# Altium PCB MAIN.PcbDoc
Units mil, origin at the board's own origin, x right, y up, seen from the top; angles counter-clockwise.
Board outline 1100 x 700 mil, 2 copper layers (SIG, GND), stack 36.8 mil thick; 16 components, 9 nets, 34 pads, 3 vias.
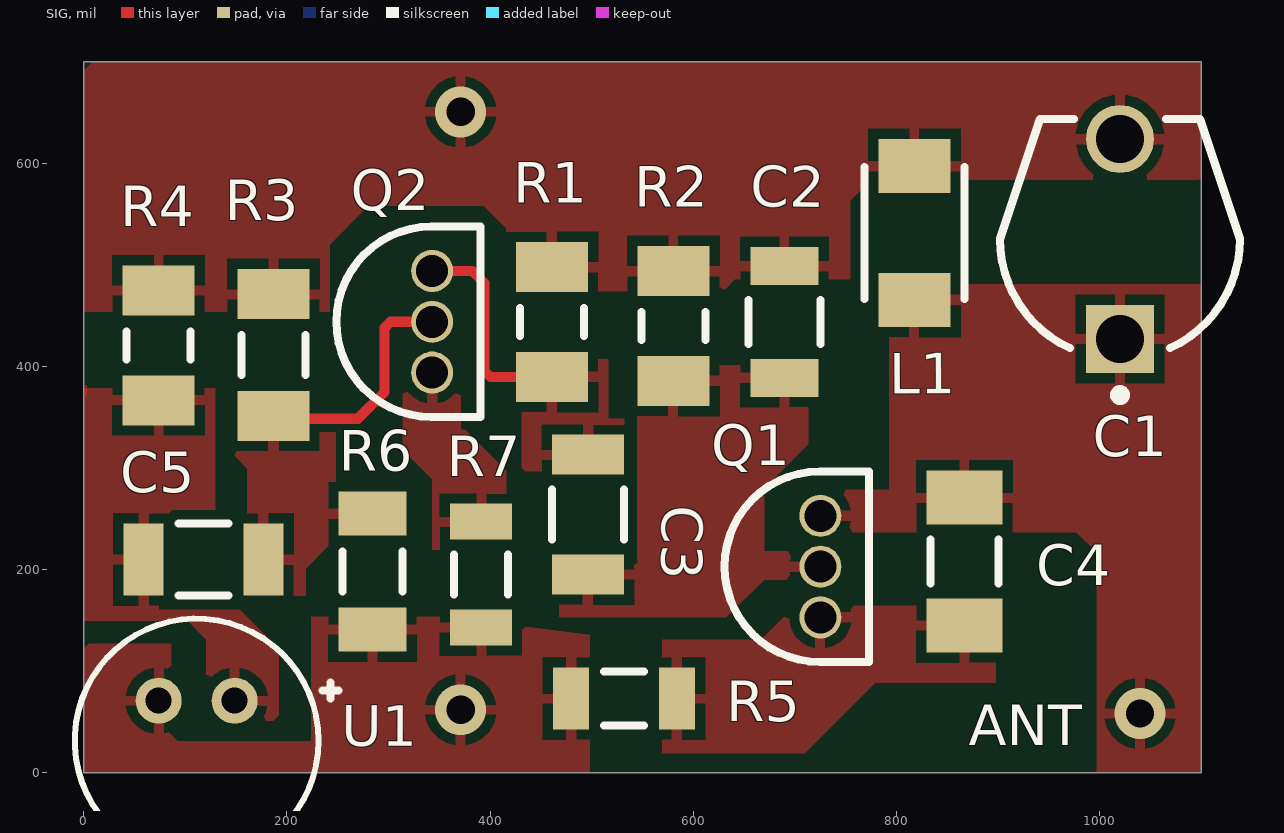
[diagram p0: SIG view]
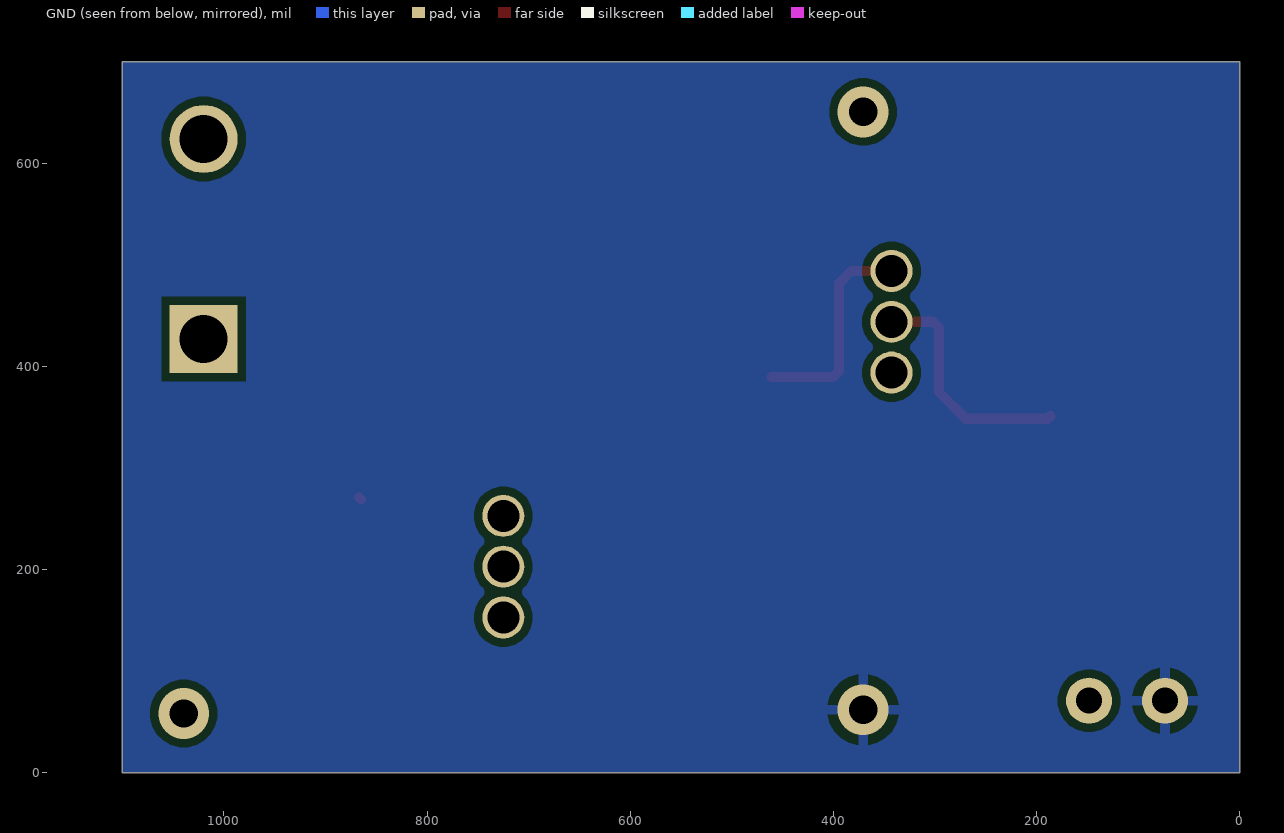
[diagram p1: GND view, seen from below]

## Layer stack, top to bottom
Top Solder: solder mask 0.4, Solder Resist, Dk 3.5
SIG: signal copper 1.4
Dielectric 3: core 34, FR-4, Dk 4.8
GND: signal copper 1.4
Bottom Solder: solder mask 0.4, Solder Resist, Dk 3.5

## Board outline
0,0 1100,0 1100,700 0,700

## Design rules (kind name [scope] priority, off if disabled: settings)
Clearance [All] p1: gap=8 ignorepadtopadclearanceinfootprint=TRUE
ComponentClearance [All] p1: gap=8 collisioncheckmode=3 verticalgap=8 showdistances=FALSE
DiffPairsRouting [All] p1: maxlimit=10 minlimit=10 mostfreqgap=10 toplayer_minwidth=10 toplayer_maxwidth=10 toplayer_prefwidth=10 bottomlayer_minwidth=10 bottomlayer_maxwidth=10 bottomlayer_prefwidth=10 maxuncoupledlength=500
HoleSize [All] p1: absolutevalues=TRUE maxlimit=300 minlimit=10 maxpercent=80.000 minpercent=20.000
MinimumAnnularRing [All] p1: minimumring=10
PasteMaskExpansion [All] p1: expansion=10
PlaneClearance [All] p1: clearance=15
PlaneConnect [All] p1: pad.planeconnectstyle=Relief pad.reliefexpansion=20 pad.reliefentries=4 pad.reliefconductorwidth=10 pad.reliefairgap=10 via.planeconnectstyle=Direct via.reliefexpansion=20 via.reliefentries=4 via.reliefconductorwidth=10 via.reliefairgap=10
PolygonConnect [All] p1: thpad.connectstyle=Relief thpad.reliefconductorwidth=10 thpad.reliefentries=4 thpad.polygonreliefangle="90 Angle" thpad.airgapwidth=10 smdpad.connectstyle=Relief smdpad.reliefconductorwidth=10 smdpad.reliefentries=4 smdpad.polygonreliefangle="90 Angle" smdpad.airgapwidth=10 via.connectstyle=Direct via.reliefconductorwidth=10 via.reliefentries=4 via.polygonreliefangle="90 Angle" via.airgapwidth=10
RoutingVias [All] p1: holewidth=10 width=20 viastyle="Through Hole" minholewidth=10 minwidth=20 maxholewidth=10 maxwidth=20
SMDNeckDown [All] p1: percent=100.000
SilkToSolderMaskClearance SilkscreenOverComponentPads [IsPad] p1: minsilkscreentomaskgap=10 clearancetoexposedcopper=TRUE
SolderMaskExpansion [All] p1: expansion=10 istentingtop=FALSE
Width [All] p1: maxlimit=10 minlimit=10 preferedwidth=10
23 further rules are at their usual default settings.

## Components (designator, comment, footprint, x,y, rotation, side; value= is the part's Value field where it differs from the comment)
C1 "TZ03R300F169B00" MURA-TZ03-2_V 1020,525.42 r90 top
C2 "C1206C103K2RACTU" FP-C1206C-EB-MFG 689.68,443.73 r270 top value="10 nF"
C3 "CC1206KRX7R9BB104" FP-CC1206-1_25-MFG 496.42,254.11 r270 top value="100 nF"
C4 "CAP 4.7pF 50V 1206(3216)" CAPC1206(3216)170_M 866.88,207.89 r90 top value=4.7pF
C5 "CC1206KRX7R9BB104" FP-CC1206-1_25-MFG 118,210 r0 top value="100 nF"
L1 "7447912" SMD-1210 817.67,531.33 r270 top
Q1 "2N3904BU" FAIR-TO-92 725.12,152.96 r90 top
Q2 "2N3904BU" FAIR-TO-92 343,394 r90 top
R1 "CRCW120610K0FKEAHP" RESC3116X65X50NL20T20 460.99,443.73 r90 top
R2 "CRCW120610K0FKEAHP" RESC3116X65X50NL20T20 580.41,439.79 r90 top
R3 "RT1206BRD071ML" RESC3116X65X40ML10T20 186.9,411.17 r90 top
R4 "CRCW120610K0FKEAHP" RESC3116X65X50NL20T20 73.78,420.87 r90 top
R5 "ERJ-8ENF1001V" RESC3216X70X50LL05T20 531.85,73.04 r0 top
R6 "CRCW1206100KFKEA" RESC3216X60X45NL10T20 284.32,197.96 r90 top
R7 "ERJ-P08J101V" RESC3216X70X50LL05T20 391.22,195.06 r90 top
U1 "POM-3535P-3-R" FP-POM-3535P-3-R-MFG 111.18,31.67 r180 top

## Footprints (in the part's own frame and the unit in brackets; to place one, negate y for a bottom-side part, rotate by r counter-clockwise, add the part's x,y. Pads: shape width x height; smd on the part's side, far side on the other; paste and mask are expansions set on the pad)
CAPC1206(3216)170_M [mm] "Chip Capacitor, Body 3.2x1.6mm, Height 1.7mm, IPC Low Density"
  rect 1.35x1.9 smd: 1(-1.6,0) 2(1.6,0)
  silkscreen extent -0.55,-0.85 0.55,0.85, body extent -1.7,-0.9 1.7,0.9, height 1.7
FAIR-TO-92 [mm] "TO, 3-Leads, Body Dia 4.79mm, Pitch 1.27mm"
  round 1.05 hole 0.8 mask+0.05: 1(0,0) 2(1.27,0) 3(2.54,0)
  silkscreen extent -1.11,-1.21 3.65,2.4, body extent -1.11,-1.21 3.65,2.4, height 5.33
FP-C1206C-EB-MFG [mm]
  rect 0.95x1.7 smd paste+0 mask+0: 1(-1.4,0) 2(1.4,0)
  silkscreen extent -0.55,-0.9 0.55,0.9, body extent -2,-1 2,1, height 0.25
FP-CC1206-1_25-MFG [mm]
  rect 1x1.8 smd paste+0 mask+0: 1(-1.5,0) 2(1.5,0)
  silkscreen extent -0.63,-0.9 0.63,0.9, body extent -2.2,-1.25 2.2,1.25, height 0.25
FP-POM-3535P-3-R-MFG [mm]
  round 1.15 hole 0.65 paste-1000 mask+0: 1(-0.95,-1) 2(0.95,-1)
  silkscreen extent -3.55,-3.05 3.05,3.05, body extent -3.15,-3.15 3.15,3.15, height 0.25
MURA-TZ03-2_V [mm] "THD, 2-Leads, Dia 6mm, Height 4.8mm"
  rect 1.7x1.7 hole 1.2: 1(-2.5,0)
  round 1.7 hole 1.2: 2(2.5,0)
  silkscreen extent -4.02,-3 3,3, body extent -3,-3 3,3, height 4.8
RESC3116X65X40ML10T20 [mm] "Chip Resistor, 2-Leads, Body 3.10x1.60mm, IPC Low Density"
  rect 1.25x1.8 smd: 1(-1.525,0) 2(1.525,0)
  silkscreen extent -0.5,-0.8 0.5,0.8, body extent -1.6,-0.85 1.6,0.85, height 0.65
RESC3116X65X50NL20T20 [mm] "Chip Resistor, 2-Leads, Body 3.10x1.60mm, IPC Medium Density"
  rect 1.25x1.8 smd: 1(-1.375,0) 2(1.375,0)
  silkscreen extent -0.35,-0.8 0.35,0.8, body extent -1.65,-0.9 1.65,0.9, height 0.65
RESC3216X60X45NL10T20 [mm] "Chip Resistor, 2-Leads, Body 3.20x1.60mm, IPC Medium Density"
  rect 1.1x1.7 smd: 1(-1.45,0) 2(1.45,0)
  silkscreen extent -0.5,-0.75 0.5,0.75, body extent -1.65,-0.85 1.65,0.85, height 0.6
RESC3216X70X50LL05T20 [mm] "Chip Resistor, 2-Leads, Body 3.20x1.60mm, IPC High Density"
  rect 0.9x1.55 smd: 1(-1.325,0) 2(1.325,0)
  silkscreen extent -0.5,-0.67 0.5,0.67, body extent -1.63,-0.82 1.62,0.82, height 0.7
SMD-1210 [mm] "Chip Inductor, 2-Leads, Body 3.2x2.5mm"
  rect 1.35x1.8 smd: 1(-1.675,0) 2(1.675,0)
  silkscreen extent -1.65,-1.25 1.65,1.25, body extent -1.6,-1.25 1.6,1.25, height 1.29

## Part data
C1: library part CMP-2000-07339-1, "Variable Capacitor, Miniature Ceramic Trimmer, Green, 30 pF, -25 to 85 degC, 2-Pin THD, Bulk", Capacitance=5.2to30pF, Case Size/Dimension=6x6x4.8mm, Dielectric=N750, Manufacturer=Murata, Package Description="2-Pin Through Hole Device, Dia 6 mm, Body Length 4.8 mm", Package Reference=TZ03, Rated Voltage=100V, Tolerance (%)=0to50%, Datasheet URL=https://datasheet.ciiva.com/29339/12-0130e-29339940.pdf, Datasheet Version="Rev. A, 04/2003", Manufacturer URL=http://www.murata.com/, Mounting Technology=ThroughHole
C2: library part CMP-1037-03529-2, "CAP CER 10000PF 200V X7R 1206", Capacitance="10,000 pF", Manufacturer=KEMET, Package=1206, Temperature="-55°C to +150°C", Temperature Characteristic=X7R, Temperature Coefficient=15%, Temperature Range High=+150°C, Temperature Range Low=-55°C, Tolerance=0.1, Voltage Rating="200 V", Automotive=Yes, Automotive Grade="Grade 0", Category=Cap, ComponentLink2Description=Datasheet, ComponentLink2URL=https://content.kemet.com/datasheets/KEM_C1007_X8R_ULTRA_150C_SMD.pdf, Device Class L1="Passive Components", Device Class L2=Capacitors, Device Class L3="Ceramic Capacitors", Digikey Description="CAP CER 10000PF 200V X7R 1206", Height=0.88mm, Ipc Land Pattern Name=CAPC320160X78, Lead Free=Yes, Manufacturer Part Number=C1206C103K2RACTU, Material=Ceramic, Mouser Description="Multilayer Ceramic Capacitors MLCC - SMD/SMT 200volts 10000pF X7R 10%", Octopart=https://octopart.com/c1206c103k2ractu-kemet-2299149, RoHS=TRUE
C3 C5: library part CMP-03422-000842-1, "CAP CER 0.1UF 50V X7R 1206", Capacitance="100 nF", Manufacturer=Yageo, Package=1206, Temperature="-55°C to +125°C", Temperature Characteristic=X7R, Temperature Coefficient=15%, Temperature Range High=+125°C, Temperature Range Low=-55°C, Tolerance=0.1, Voltage Rating="50 V", Automotive=No, Automotive Grade=NA, Category=Cap, ComponentLink2Description=Datasheet, ComponentLink2URL=http://www.yageo.com/documents/recent/UPY-NP0X7R_HV_1KV-to-3KV_11.pdf, Device Class L1="Passive Components", Device Class L2=Capacitors, Device Class L3="Ceramic Capacitors", Digikey Description="CAP CER 0.1UF 50V X7R 1206", Footprint Url=http://www.yageo.com/exep/pages/download/literatures/UPY-C_GEN_24.pdf, Height=1.45mm, Lead Free=Yes, Manufacturer Part Number=CC1206KRX7R9BB104, Material=Ceramic, Mouser Description="Multilayer Ceramic Capacitors MLCC - SMD/SMT 100nF 50V X7R 10%", Octopart=https://octopart.com/cc1206krx7r9bb104-yageo-39467816, RoHS=TRUE
C4: library part CMP-1037-00382-1, Case-EIA=1206, Case-Metric=3216, Rated Voltage="50 V", Tolerance=Â±0.25pF, Max Thickness="1.7 mm", Technology=SMT
L1: library part CMP-0221-00034-1, "SMD-Multilayer Inductor WE-MI, L = 0.10 µH", Inductance="0.10 µH", ComponentLink1Description="Manufacturer Link", ComponentLink1URL=http://www.we-online.com, ComponentLink2Description=Datasheet, ComponentLink2URL=http://www.we-online.de/katalog/media/pdf/7447912.pdf, DatasheetVersion="ver 5, Oct-2004", PackageDescription="Chip Inductor, 2-Leads, Body 3.2 x 2.5 mm", PackageReference=1206, PackageVersion=2007
Q1 Q2: library part CMP-2000-04944-1, "NPN General-Purpose Amplifier, 40 V VCEO, 0.2 A, -55 to 150 degC, 2-Pin TO-92, RoHS, Bulk", Manufacturer=FairchildSemiconductor, Maximum Collector Base Voltage=60V, Maximum Collector Emitter Saturation Voltage=0.2@1mA@10mA, Maximum Collector Emitter Voltage=40V, Maximum DC Collector Current=0.2A, Maximum Operating Frequency=300(Min)MHz, Maximum Power Dissipation=625mW, Minimum DC Current Gain=40@0.1mA@1V, Operating Temperature=-55to150degC, Package=3TO-92, Package Description="3-Pin Transistor Outline Package, Body Dia 4.79 mm, Pitch 1.27 mm", Package Reference=TO-92, Category=GPBJT, Datasheet URL=https://datasheet.ciiva.com/4722/2n3904-82270-4722369.pdf, Datasheet Version="Rev. 1.1.0, 10/2014", Manufacturer URL=https://www.fairchildsemi.com/, Mounting=ThroughHole, Packaging=Bulk, Pin Count=3, Rad Hard=No, Type=NPN
R1 R2 R4: library part CMP-2003-04883-1, Manufacturer="Vishay Dale", Part Number=CRCW120610K0FKEAHP
R3: library part CMP-2003-04285-1, Manufacturer=Yageo, Part Number=RT1206BRD071ML
R5: library part CMP-2003-00017-1, Manufacturer=Panasonic, Part Number=ERJ-8ENF1001V
R6: library part CMP-1014-00736-2, Manufacturer="Vishay Dale", Part Number=CRCW1206100KFKEA
R7: library part CMP-2003-00713-1, Manufacturer=Panasonic, Part Number=ERJ-P08J101V
U1: library part CMP-231723-000001-1, "MIC COND ANALOG OMNI -35DB 6MM D", Operating Supply Current=500uA, Package Quantity=100, Resistance=2200R, Voltage Rating=2V, Depth=3.7mm, Diameter=6mm, Direction=Omnidirectional, Height=3.7mm, Impedance=2.2kR, Mount="Through Hole", Output Type=Analog, Packaging=Bulk, Shape=Round, Termination="PC Pins"

## Via types
v1: diameter 50, hole 28, SIG to GND, 3 vias

## Nets (pads, with @x,y where several pads share a name; then routed paths per layer and width w, separated by ;. In a path a pad name is that pad's centre, name@x,y a point inside that pad or via, vN(x,y) a via of type N, cw(c..) or ccw(c..) an arc to the next point about the centre after c; other vN are vias at no path point)
9V: C1.2 C2.1 L1.1 R1.2 R2.2 R3.2 R4.2
  other v1: 370.95,650.54
GND: R5.1 R6.1 R7.1 U1.2
  other v1: 370.95,62.03
NetC1_1: C1.1 C4.2 L1.2 Q1.3 | length 2.7
  SIG w10: C4.2@865,269 C4.2
  other v1: 1039.68,58.44
NetC2_2: C2.2 C3.2 Q1.2 R2.1 | length 2.8
  SIG w10: Q1.2@723.15,200.99 Q1.2
NetC3_1: C3.1 Q2.3 R1.1 | length 211.9
  SIG w10: Q2.3 382.46,494 394.57,481.89 394.57,395.46 400.43,389.6 R1.1
NetC4_1: C4.1 Q1.1 R5.2
NetC5_1: C5.1 R4.1 U1.1
NetC5_2: C5.2 Q2.2 R3.1 R6.2 | length 234
  SIG w10: R3.1@186.79,351.02 R3.1 189.54,348.49 269.86,348.49 296.21,374.83 296.21,438.14 302.07,444 Q2.2
NetQ2_1: Q2.1 R7.2 | length 0.8
  SIG w10: Q2.1@342.41,393.41 Q2.1

## Polygon pours and split planes (outlines as drawn)
NetC3_1 on SIG "NETC3_1_L01_P007" (solid, pour order 7): 431.15,407.09 516.1,407.09 516.1,348.49 531.85,348.49 531.85,296.66 431.15,296.66 431.15,332.28
NetC1_1 on SIG "NETC1_1_L01_P016" (solid, pour order 16): 792.91,411.17 792.91,475.73 798.2,481.02 1100,481.02 1100,0 996.9,0 996.9,217.06 977.04,236.92 713.28,236.92 713.28,278.44 764.52,278.44 792.91,278.44
NetQ2_1 on SIG "NETQ2_1_L01_P012" (solid, pour order 12): 342.41,240.74 342.41,219.51 415.71,219.51 415.71,297.42 375.53,337.6 370.95,337.6 370.95,407.09 313.85,407.09 313.85,318.13 343,288.98 343,201.39
NetC4_1 on SIG "NETC4_1_L01_P015" (solid, pour order 15): 569.33,19.36 569.33,131.26 664.48,131.26 665.73,130 700.3,164.57 887.18,164.57 897.95,153.79 897.95,88.76 779.2,88.76 709.81,19.36
GND on SIG "GND_L01_P002" (solid, pour order 2): 0,122.07 4.93,127 86.38,127 86.38,37.69 92.84,31.23 223.91,31.23 223.91,153.79 358.16,153.79 498,136.14 498,1.07 499.07,0 0,0 0,124.07
9V on SIG "9V_L01_P003" (solid, pour order 3): 0,453.82 241.77,453.82 242.02,453.57 242.02,519.69 280.32,557.99 393.97,557.99 415.71,536.25 415.71,474.16 629.28,474.16 640.94,485.83 754.68,485.83 754.68,563.99 755.46,563.99 775.2,583.73 1097.09,583.73 1100,580.82 1100,700 9.18,700 0,690.82
NetC5_1 on SIG "NETC5_1_L01_P004" (solid, pour order 4): 0,379.77 1,378.77 129.43,378.77 129.43,259.21 86.38,259.21 86.38,258.03 73.78,245.43 73.78,160.79 153.43,160.79 191.9,122.32 191.9,56.46 186.79,51.35 120.88,51.35 120.88,131.26 102.41,149.73 0,149.73
no net on SIG "NONET_L01_P005" (solid, pour order 5): 0,379.77 1.39,381.16 2.38,381.16 2.38,373.27 0,370.88
NetC5_2 on SIG "NETC5_2_L01_P006" (solid, pour order 6): 161.18,299.28 141.46,318.99 141.46,364.99 238.76,364.99 248,355.75 248,286 249.52,286 304.01,286 304.01,224.85 242.25,224.85 218.39,200.99 218.39,174.57 161.18,174.57
NetC2_2 on SIG "NETC2_2_L01_P014" (solid, pour order 14): 467.88,149.9 467.88,202.96 540.64,202.96 545.63,207.95 544.98,208.61 544.98,401.18 713.28,401.18 713.28,323.43 665.92,276.07 669.77,272.21 669.77,217.95 720.04,217.95 723.15,221.06 724.53,219.68 724.53,190.12 669.77,190.12 632.62,152.96 469.05,152.96 465.99,149.9
GND on GND "GND_L02_P017" (solid, pour order 17): 0,700 1100,700 1100,0 0,0

## Silkscreen, mask and mechanical layers (free items; w line width, h text height)
Top Overlay:
  text "ANT" at 871.1,27.36 h40
Board:
  the board outline again, w0
Board Shape:
  the board outline again, w10